# Altium PCB PCB1.2.PcbDoc (part 1 of 2)
Units mil, origin at the board's own origin, x right, y up, seen from the top; angles counter-clockwise.
Board outline 1692.91 x 1692.91 mil, 4 copper layers (Top Layer, Mid-Layer 1, Mid-Layer 2, Bottom Layer); 153 components, 106 nets, 555 pads, 234 vias.
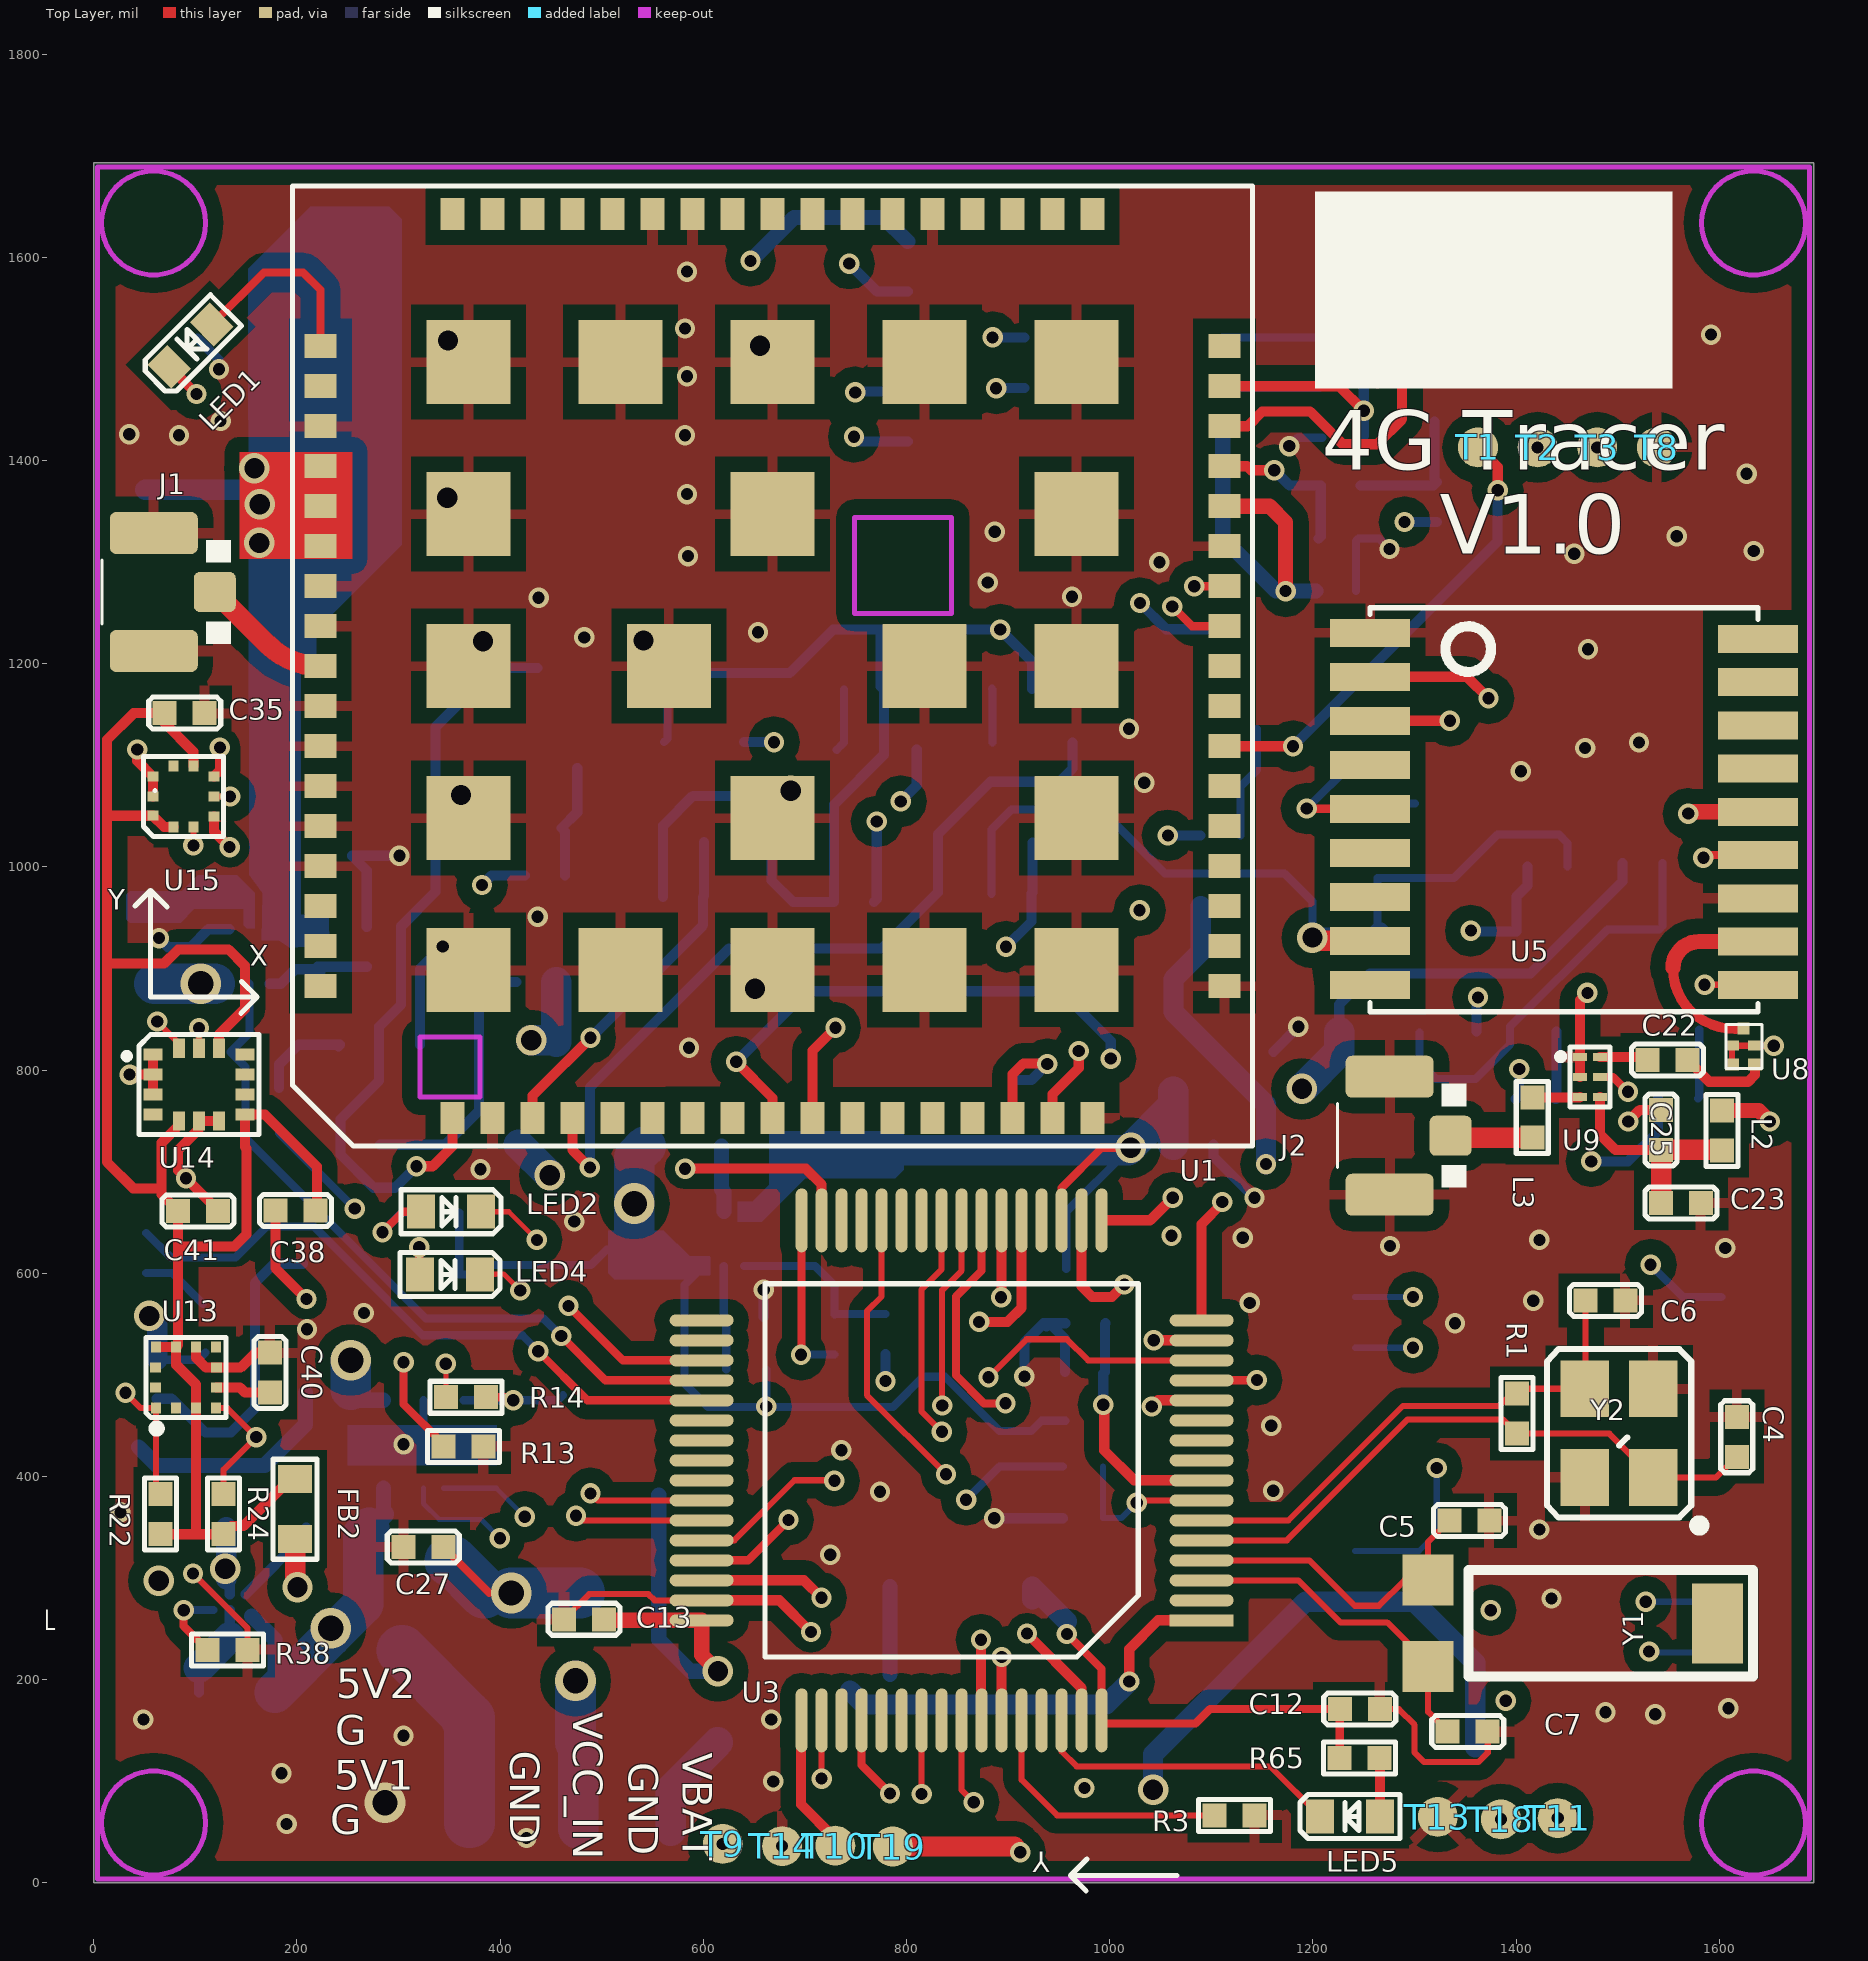
[diagram p0: Top Layer view]
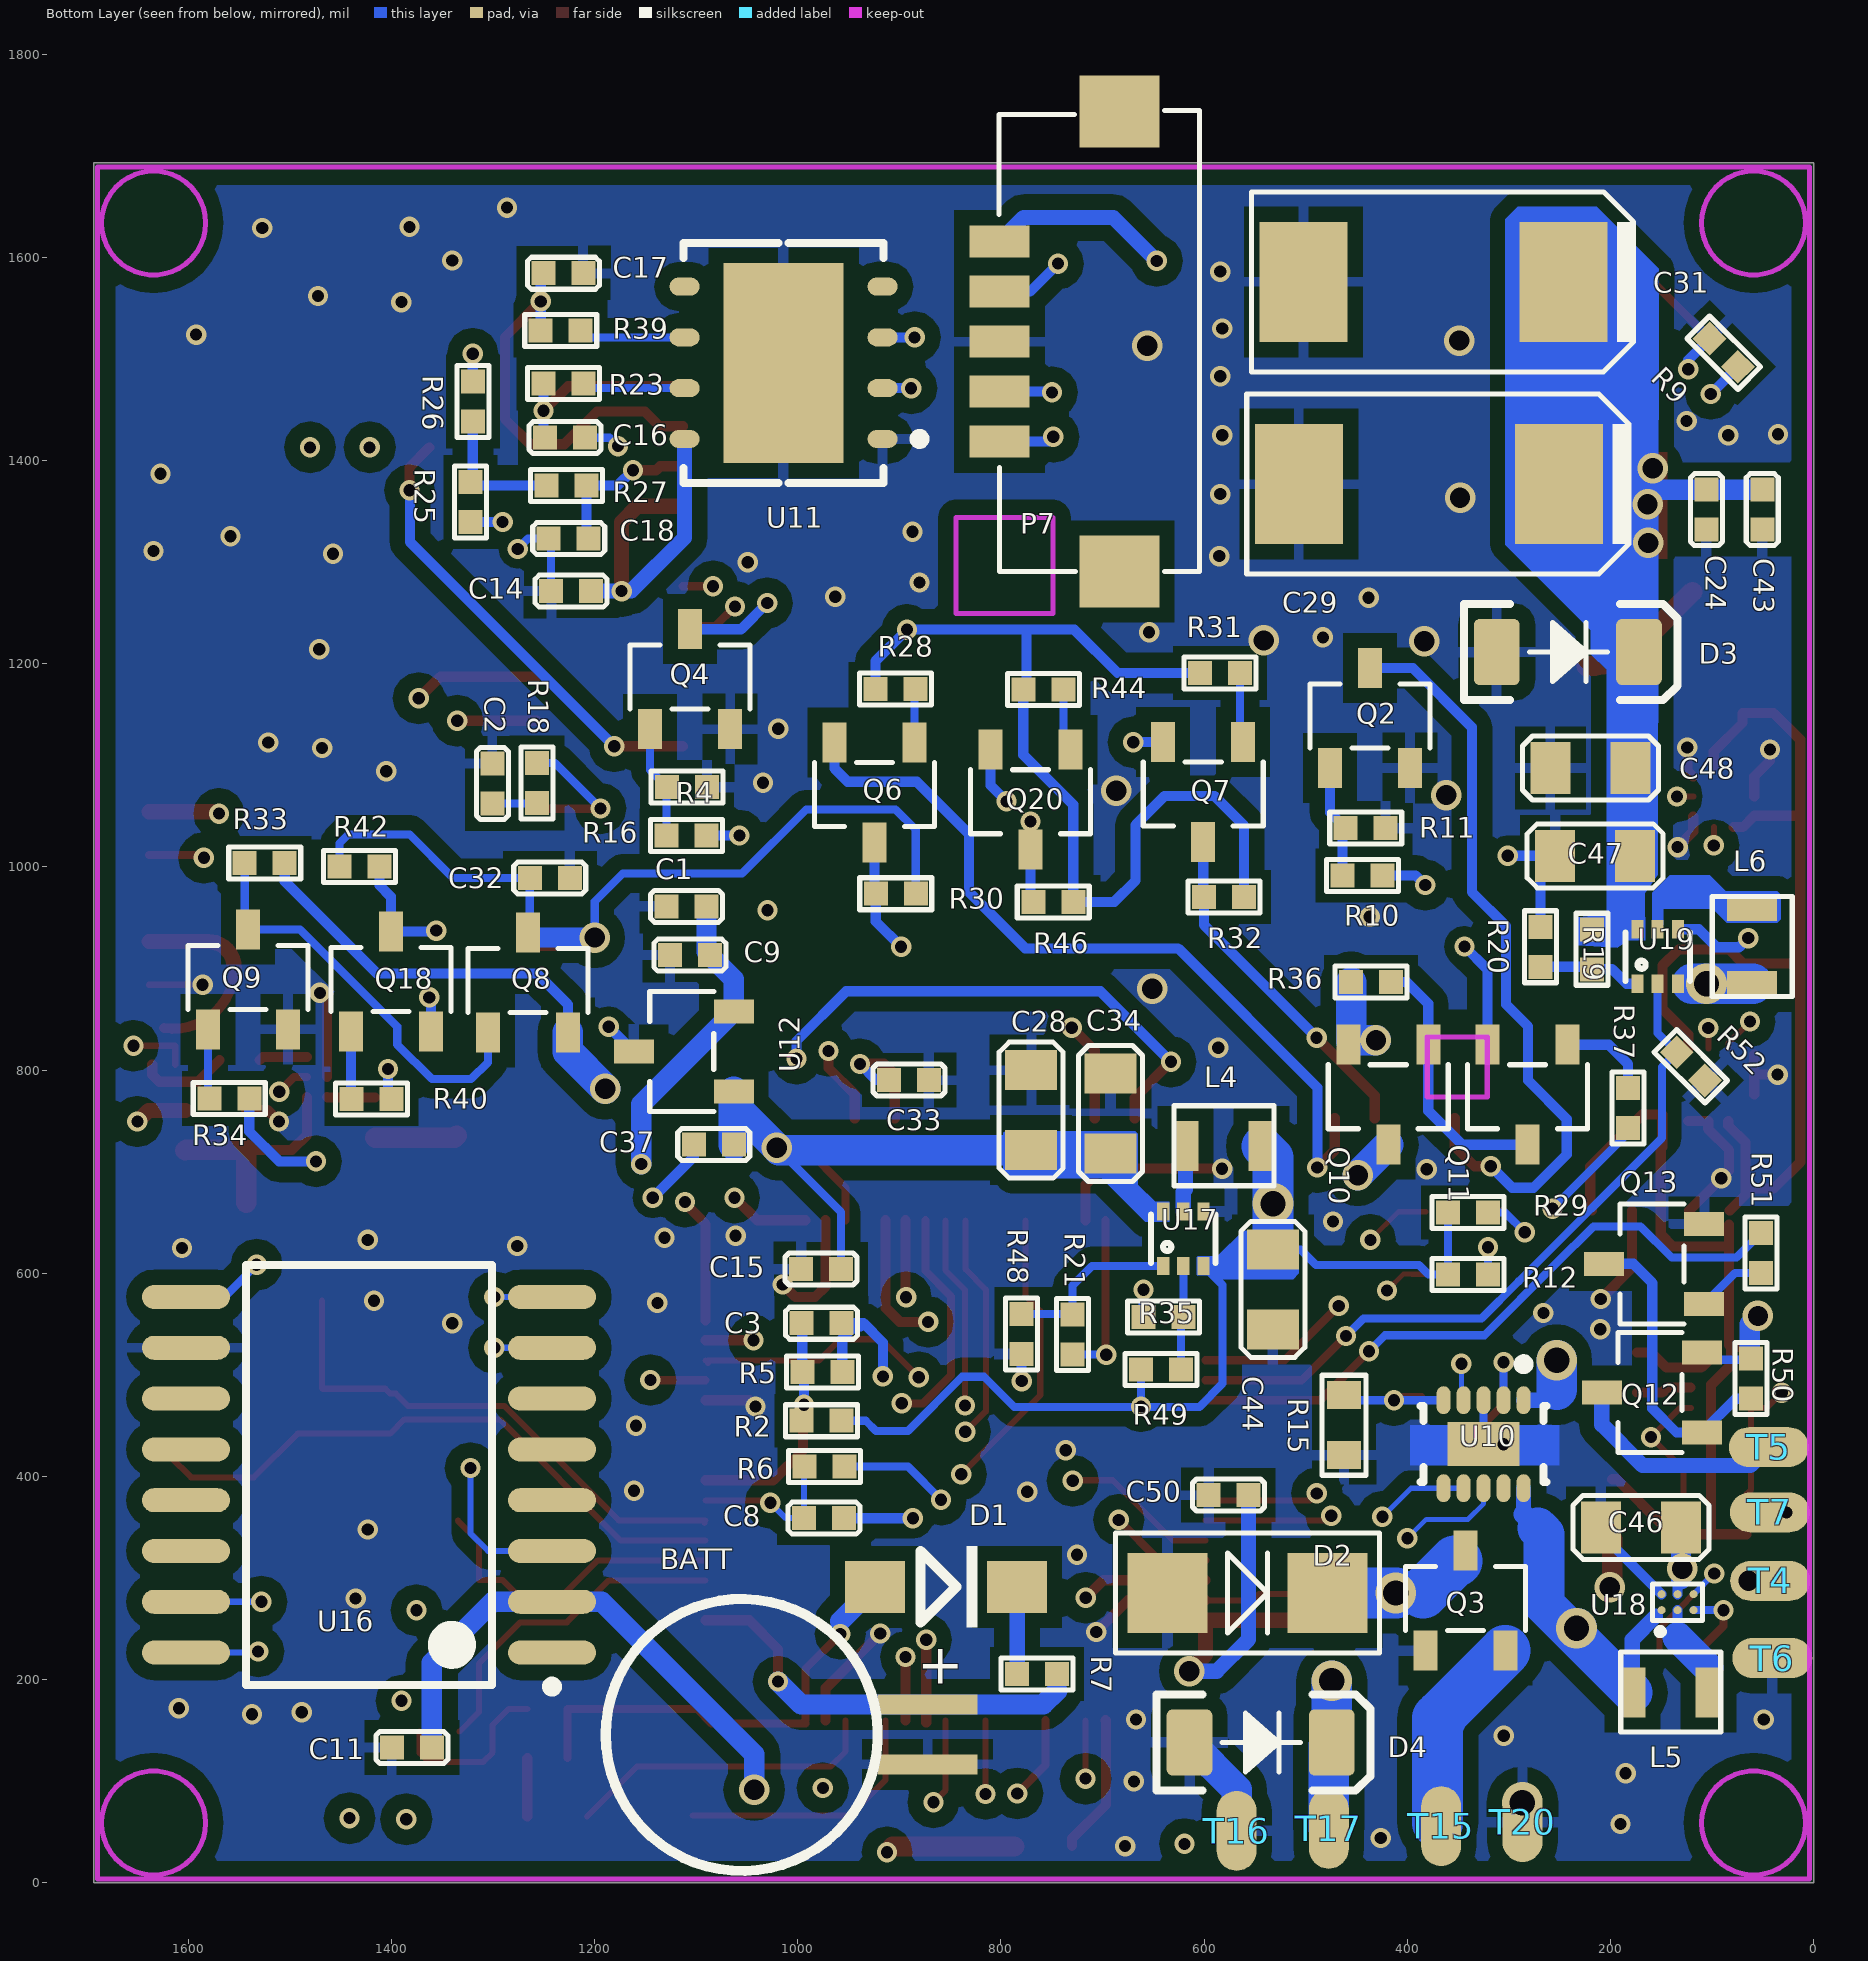
[diagram p1: Bottom Layer view, seen from below]
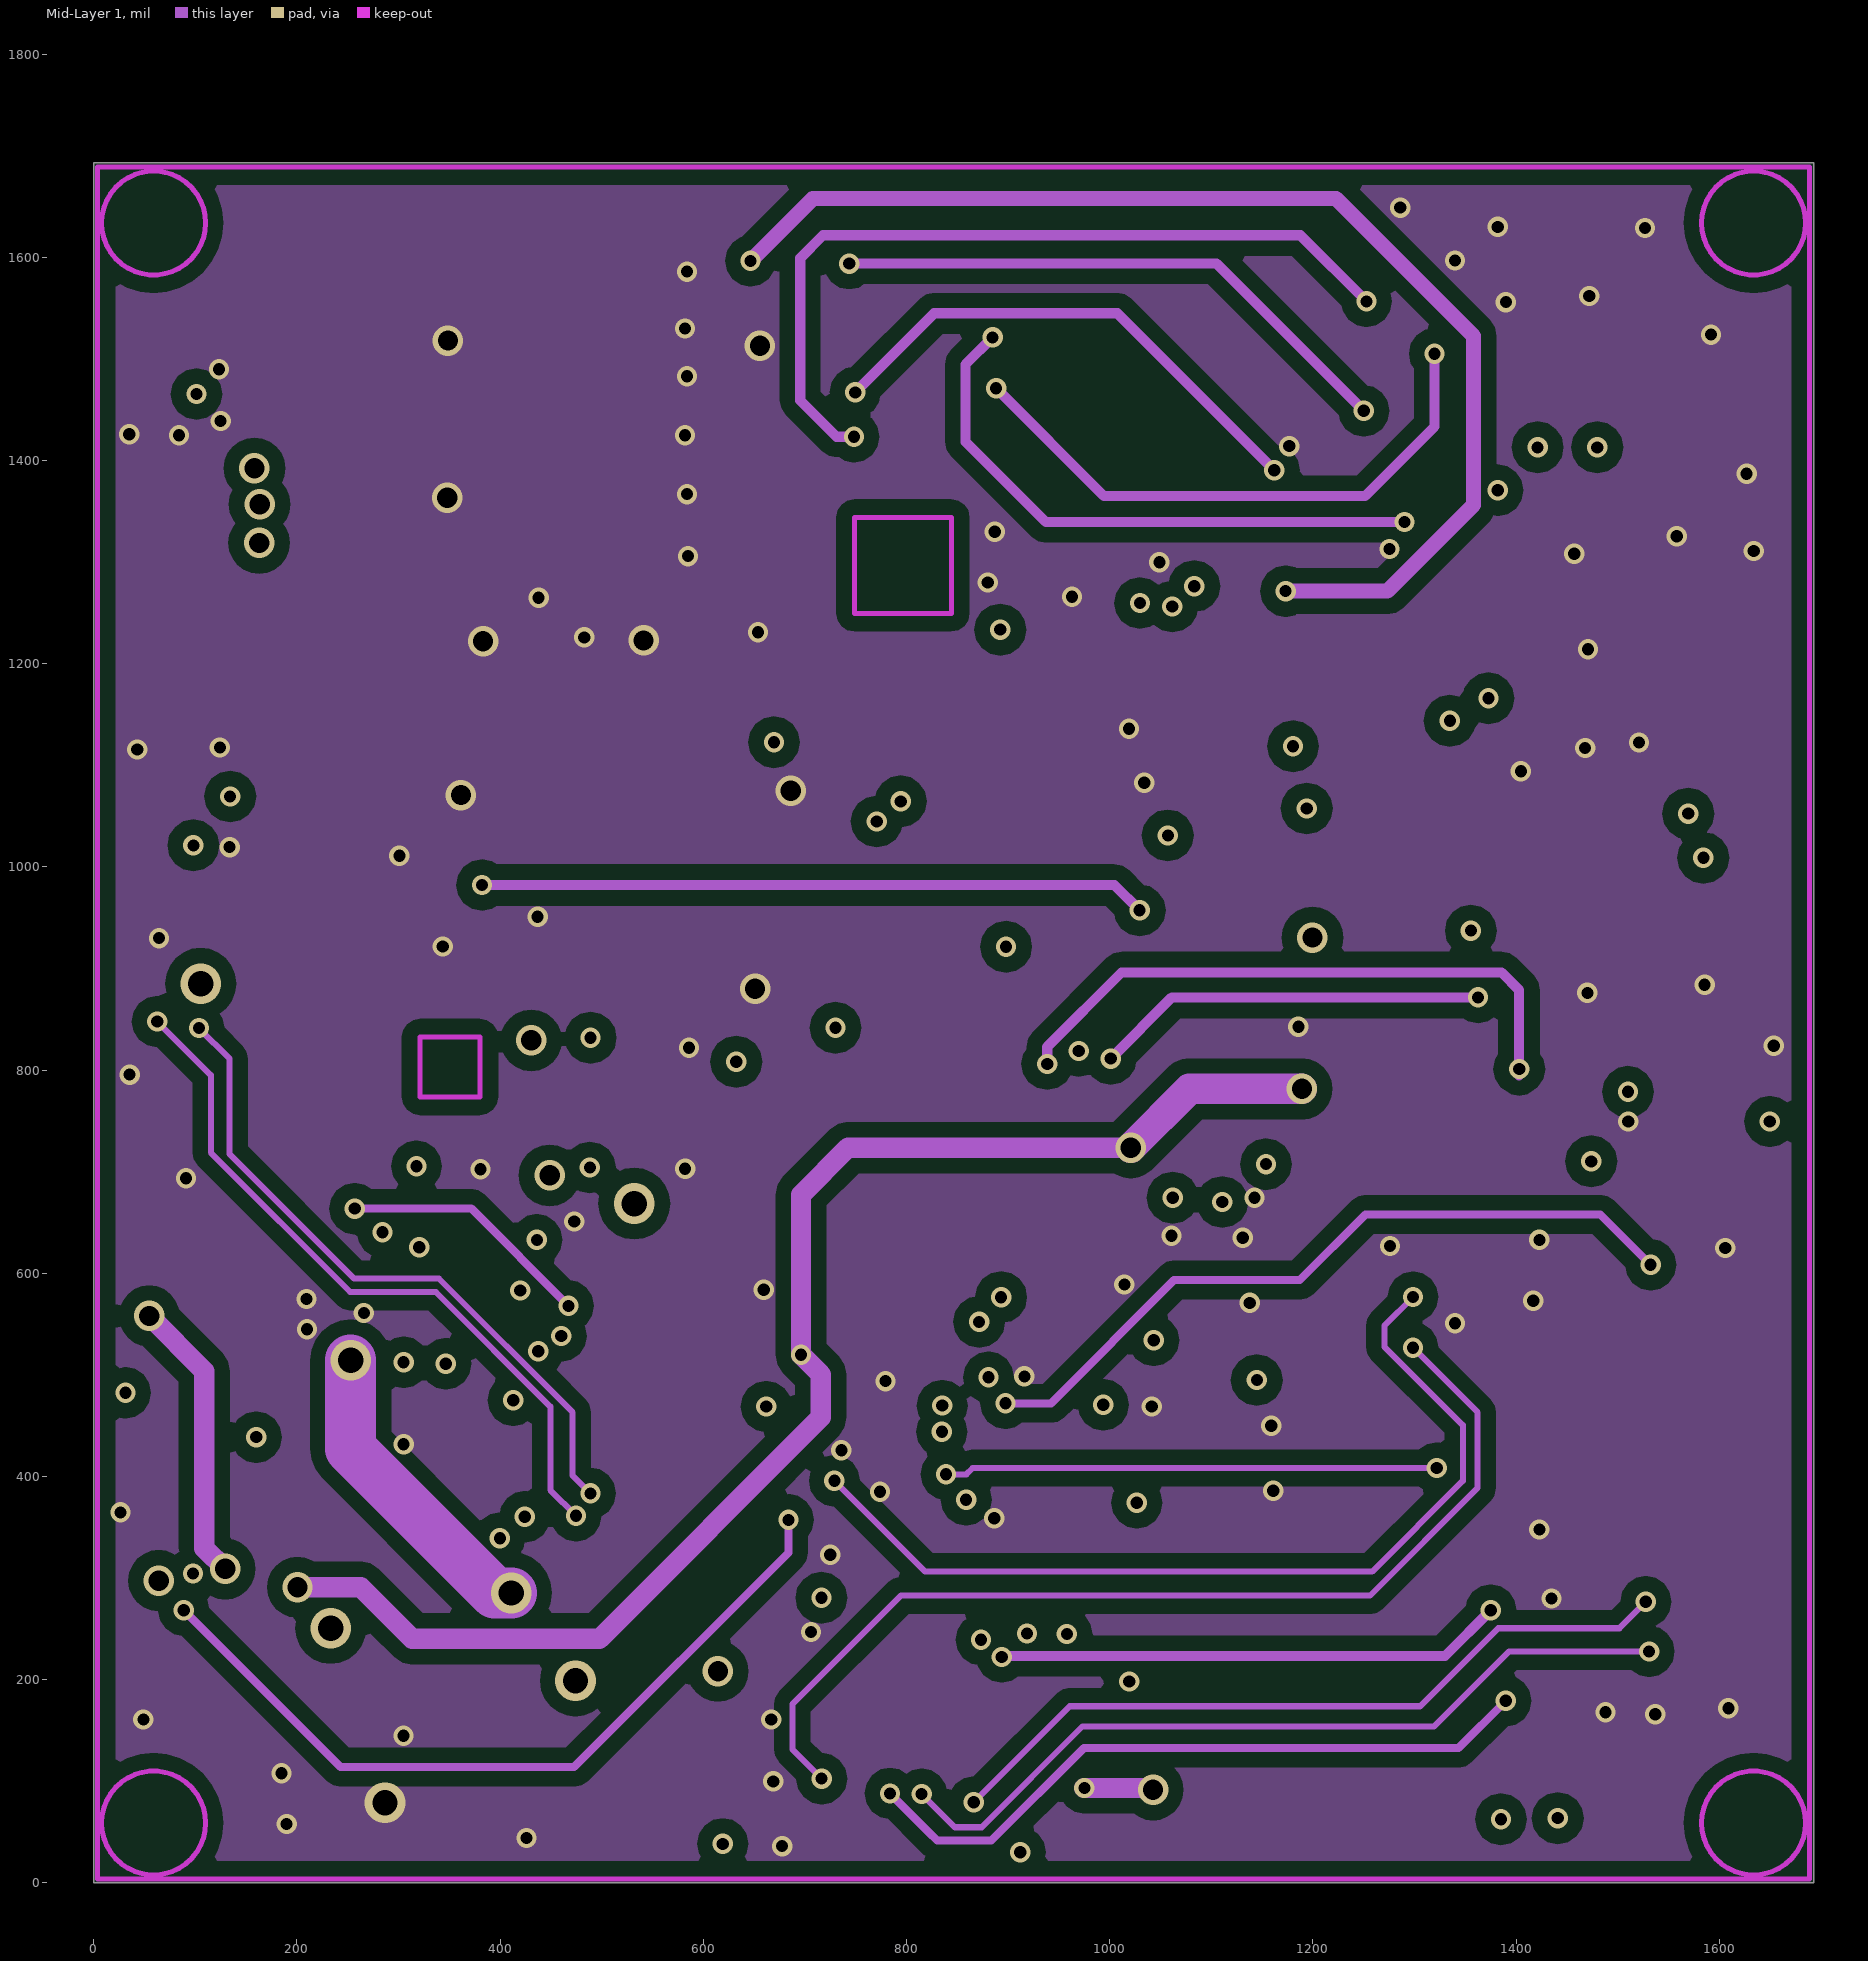
[diagram p2: Mid-Layer 1]
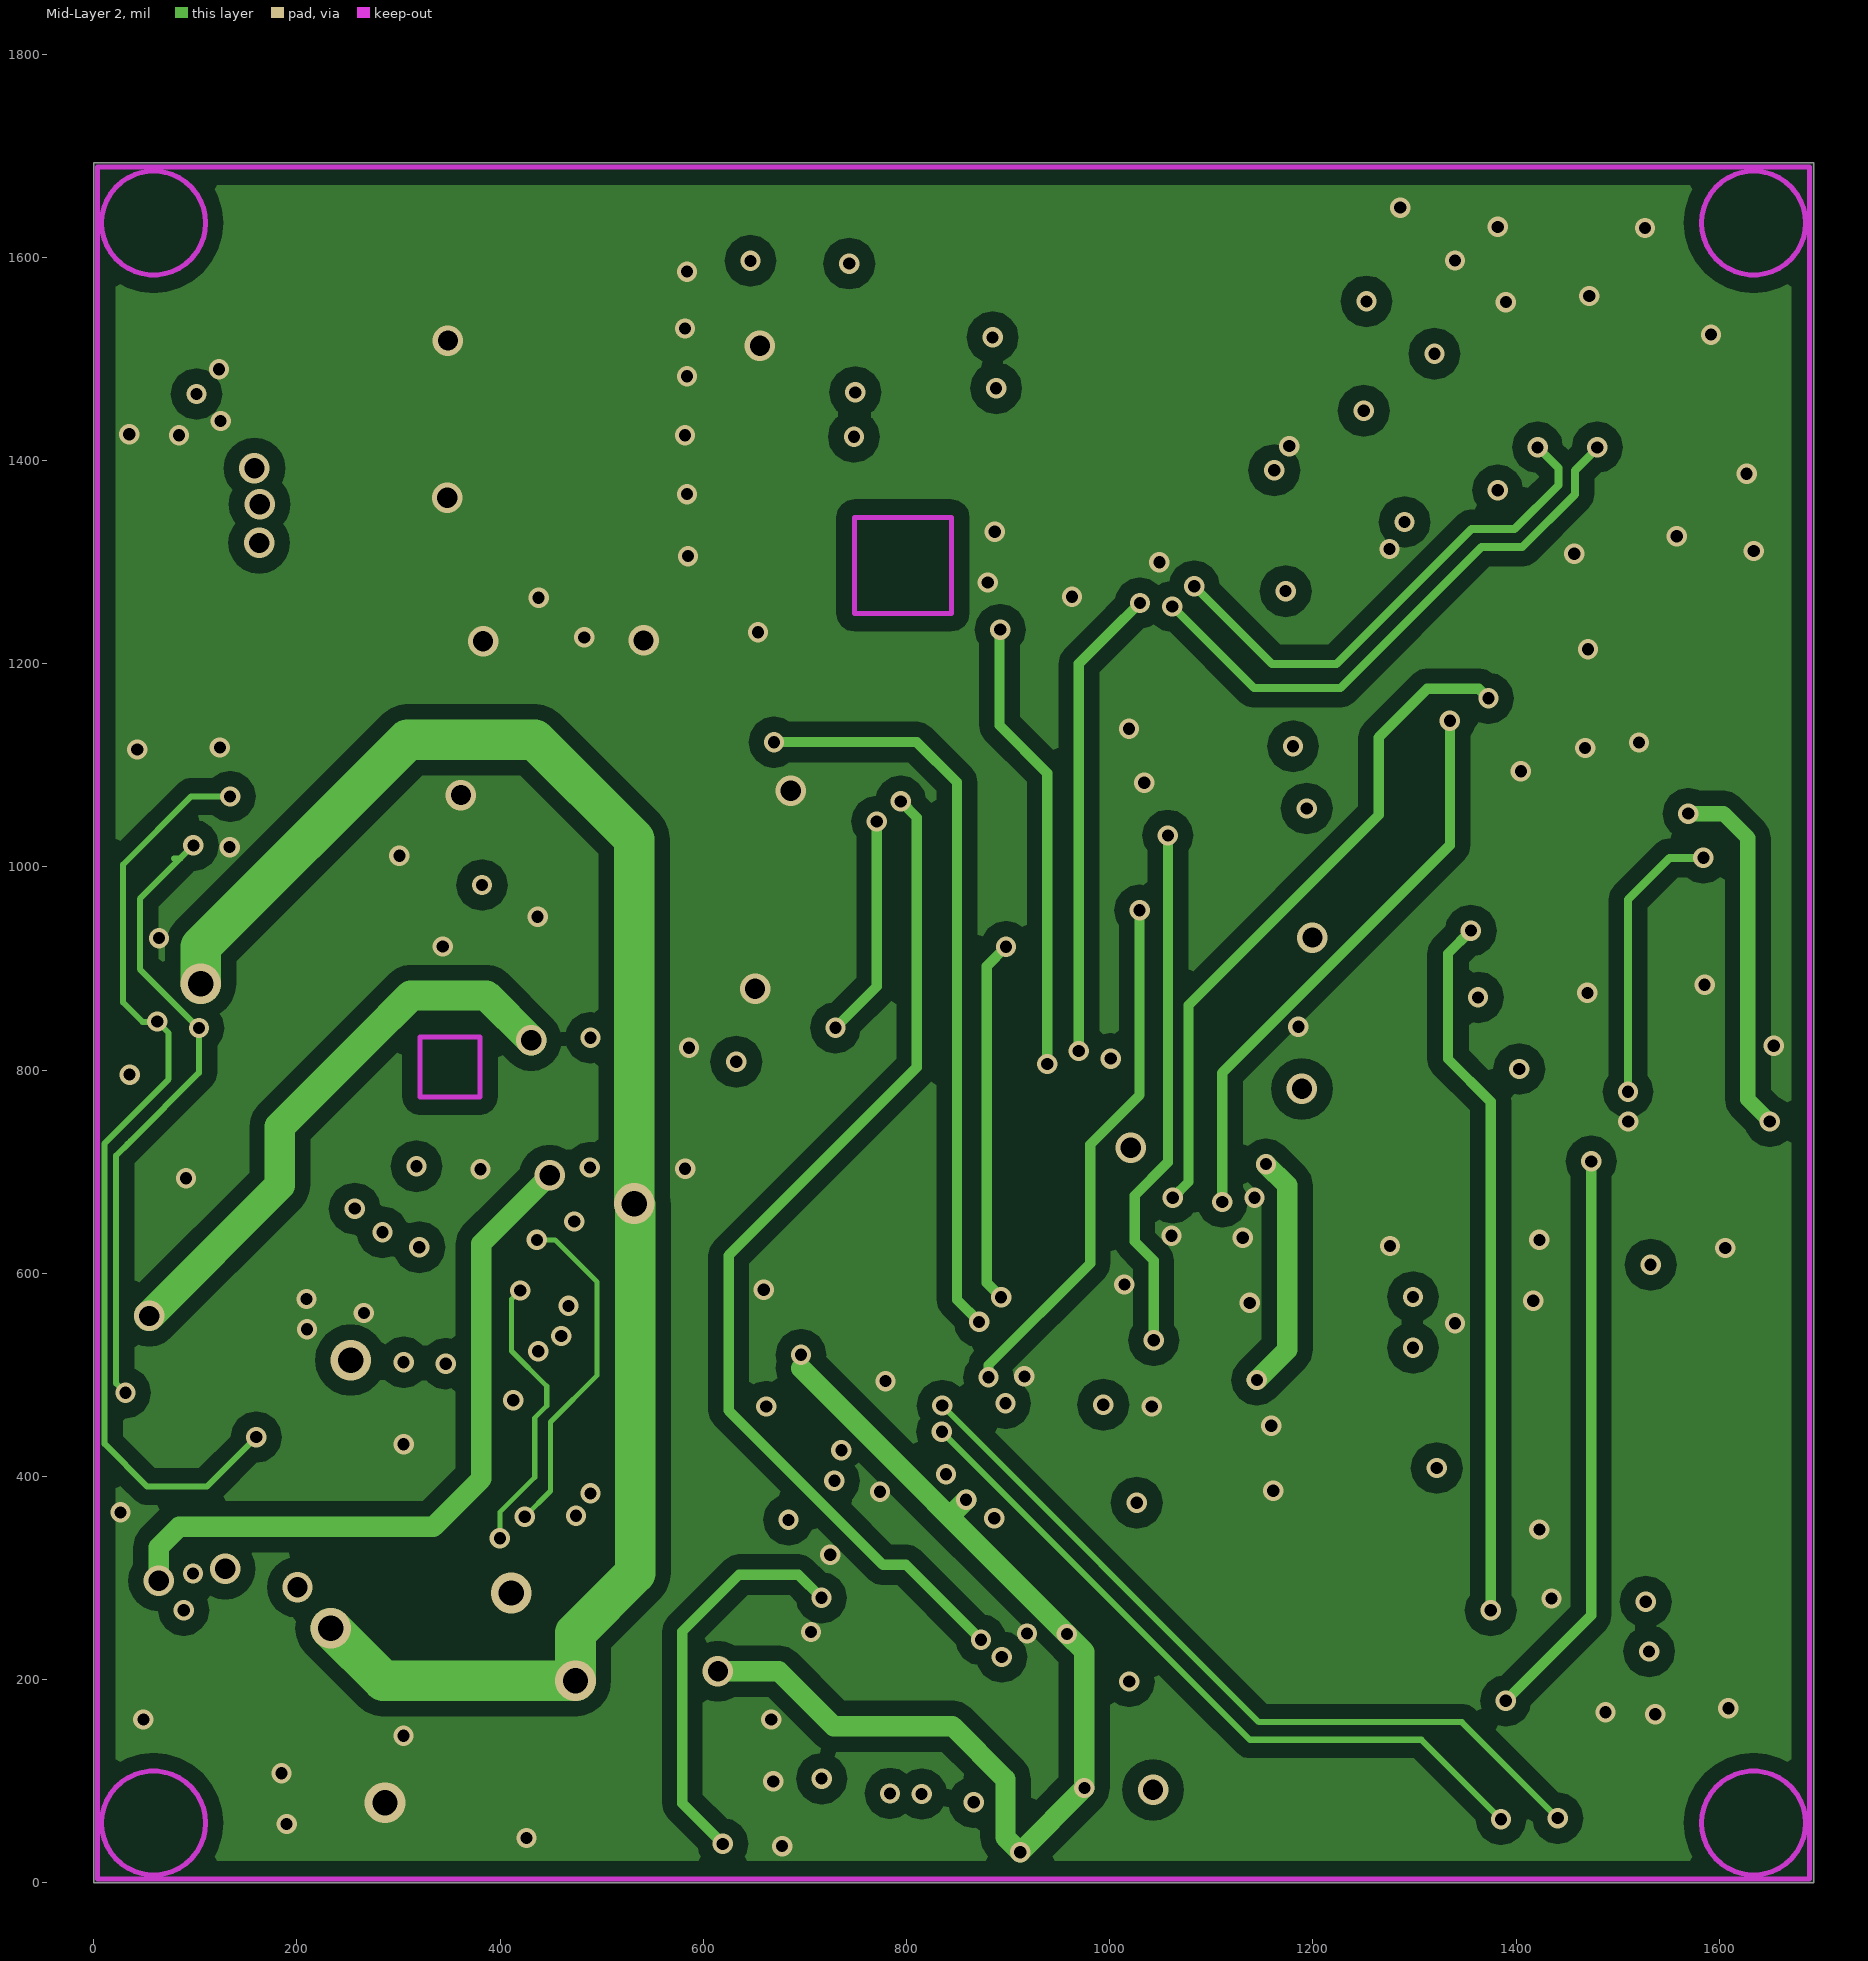
[diagram p3: Mid-Layer 2]

## Layer stack, top to bottom
Top Layer: signal copper 1.4
Dielectric: core 12.6, FR-4, Dk 4.8
Mid-Layer 1: signal copper 1.4
Dielectric: prepreg 12.6, FR-4, Dk 4.8
Mid-Layer 2: signal copper 1.4
Dielectric: core 12.6, FR-4, Dk 4.8
Bottom Layer: signal copper 1.4

## Board outline
0,0 0,1692.91 1692.91,1692.91 1692.91,0

## Design rules (kind name [scope] priority, off if disabled: settings)
Clearance [InPolygon  And InNet(AGND)] p1: gap=15
Clearance Clearance_1 [All] p2: gap=5
HoleToHoleClearance [All] p1: gap=5 allowstackedmicrovias=TRUE
MinimumSolderMaskSliver [All] p1: minsoldermaskwidth=1
PolygonConnect PolygonConnect_1 [InNet('AGND') And IsVia] p1: connectstyle=Direct reliefconductorwidth=10 reliefentries=4 polygonreliefangle="90 Angle"
PolygonConnect [All] p2: connectstyle=Relief reliefconductorwidth=10 reliefentries=4 polygonreliefangle="90 Angle"
RoutingVias [All] p1: holewidth=28 width=50 viastyle="Through Hole" minholewidth=28 minwidth=50 maxholewidth=28 maxwidth=50
SilkToSilkClearance [All] p1: silktosilkclearance=5
SilkscreenOverComponentPads [All] p1: minsilkscreentomaskgap=1
SolderMaskExpansion [All] p1: expansion=4
Width [All] p1: maxlimit=200 minlimit=5 preferedwidth=10
24 further rules are at their usual default settings.

## Classes and differential pairs
component class sensors: C35 C38 C40 C41 FB2 R22 R24 U13 U14 U15
component class power: C1 C27 C28 C34 C37 C44 C46 C47 C48 D2 D4 L4 L5 L6 LED2 LED4 Q3 Q8 Q9 Q10 Q11 Q12 Q13 R12 R13 R14 R15 R19 R20 R21 R29 R33 R34 R35 R36 R37 R38 R48 R49 R50 R51 R52 T4 T5 T6 T7 T15 T16 T17 T20 U10 U12 U17 U18 U19
component class GPS&&lte: C14 C16 C17 C18 C22 C24 C25 C26 C29 C30 C31 C33 C43 D3 J1 J2 L3 LED1 P7 Q2 Q6 Q7 Q18 Q19 Q20 Q21 R8 R9 R10 R11 R23 R25 R26 R27 R28 R30 R31 R32 R39 R40 R41 R42 R43 R44 R45 R46 R47 T1 T2 T3 T8 U8 U9 U11
component class CPU: BATT C3 C4 C5 C6 C7 C8 C9 C11 C12 C13 C15 C50 D1 LED5 R1 R2 R3 R5 R6 R7 R65 T9 T10 T11 T13 T14 T18 T19 U3 U16 U? Y1 Y2
component class 4G: C2 C23 C32 L2 Q4 R4 R16 R18 U1 U5 U?

## Components (designator, comment, footprint, x,y, rotation, side; value= is the part's Value field where it differs from the comment)
BATT "MS621FE" MS621FE 872.01,146.21 r180 bottom
C1 "0.1uF/25V" 0402c 1089.72,961.28 r0 bottom
C2 "4.7uF/10V" 0402c 1300.49,1101.8 r270 bottom
C3 "0.1uF/25v" 0402c 996.01,550.96 r180 bottom
C4 "22pF" 0402c 1617.28,458.89 r270 top
C5 "6pF" 0402c 1334.39,356.65 r0 top
C6 "22pF" 0402c 1507.66,573.47 r180 top
C7 "6pF" 0402c 1332.81,148.94 r0 top
C8 "0.1uF/25V" 0402C 954.15,359.06 r0 bottom
C9 "0.1uF/25V" 0402C 1125.8,913.17 r180 bottom
C11 "0.1uF/25V" 0402C 1399.36,133.32 r180 bottom
C12 "0.1uF/25V" 0402C 1265.91,171.19 r180 top
C13 "0.1uF/25V" 0402C 462.99,259.57 r0 top
C14 "0.1uF" 0402C 1242.61,1271.52 r180 bottom
C15 "0.1uF/25V" 0402C 996.63,604.27 r180 bottom
C16 "10pF/NC" 0402C 1209.23,1422.54 r0 bottom
C17 "10pF/NC" 0402C 1210.93,1584.43 r0 bottom
C18 "10pF/NC" 0402C 1244.98,1323.16 r180 bottom
C22 "36pF" 0402c 1568.88,809.95 r180 top
C23 "4.7uF" 0402c 1581.96,669.2 r180 top
C24 "10pF" 0402C 105.52,1331.99 r90 bottom
C25 "0.1uF" 0402C 1542.8,760.92 r270 top
C27 "1uF/25V" 0402C 344.14,330.73 r180 top
C28 "22uF/10V" 0805C 770.13,721.31 r90 bottom
C29 "1000uF" 7343 250.82,1376.86 r0 bottom
C31 "1000uF" 7343 246.2,1575.91 r0 bottom
C32 "10uF/10V" 0402C 1224.24,989.17 r0 bottom
C33 "0.1uF" 0402C 870.74,790.24 r0 bottom
C34 "22uF/10V" 0805C 692.01,718.02 r90 bottom
C35 "0.1uF/25V" 0402C 109.37,1151.43 r180 top
C37 "0.1uF/25V" 0402c 1062.85,726.85 r0 bottom
C38 "0.1uF/25V" 0402C 178.89,661.86 r0 top
C40 "22pF" 0402c 173.68,482.65 r90 top
C41 "0.1uF/25V" 0402C 122.56,661.31 r180 top
C43 "33pF" 0402C 50.52,1331.99 r90 bottom
C44 "22uF/10V" 0805C 532.3,623.68 r270 bottom
C46 "22uF/10V" 0805C 130.61,350.05 r0 bottom
C47 "22uF/10V" 0805C 175.66,1011 r0 bottom
C48 "22uF/10V" 0805C 180.33,1097.41 r0 bottom
C50 "0.1uF/25V" 0402C 595.63,381.79 r180 bottom
D1 "1N4148" DIODE_SOP 923.93,291.5 r180 bottom
D2 "SMAJ12CA" SMA 635.95,285.46 r180 bottom
D3 "DIODE_SCHOTTKY_0" LL-34(D1206) 241.83,1211.58 r180 bottom
D4 "DIODE_SCHOTTKY_0" LL-34(D1206) 544.3,138.31 r180 bottom
FB2 "10R/1A" 0603R 198.31,338.35 r90 top
J1 "IPEX" RF-UFL 59.23,1270.68 r90 top
J2 "IPEX" RF-UFL 1275.57,735.51 r90 top
L2 "27nH" 0402R 1602.59,760.37 r270 top
L3 "LQW15A" 0402R 1415.99,772.98 r270 top
L4 "SRP4020TA-1R0M" L2520 618.1,725.29 r180 bottom
L5 "SRP4020TA-2R2M" L2520 178.44,187.47 r180 bottom
L6 "SRP4020TA-1R0M" L2520 60.79,959.55 r270 bottom
LED1 "LED" 0603LED 116.28,1534.01 r225 top
LED2 "LED" 0603LED 322.31,660.67 r0 top
LED4 "LED" 0603LED 321.42,598.88 r0 top
LED5 "LED" 0603LED 1266.17,65.51 r180 top
P7 "Header 5" 5×1.25mmSMT 801.29,1418.68 r90 bottom
Q2 "MMBT3904" SOT23-3 475.97,1097.49 r270 bottom
Q3 "Si2369DS" sot23-3 382.17,228.73 r270 bottom
Q4 "MMBT3904" SOT23-3 1145.18,1135.64 r270 bottom
Q6 "MMBT3904" SOT23-3 884.79,1122.61 r90 bottom
Q7 "MMBT3904" SOT23-3 561.39,1122.86 r90 bottom
Q8 "Si2369DS" sot23-3 1304.83,837.26 r270 bottom
Q9 "S8050" SOT23-3 1580.35,840.22 r270 bottom
Q10 "Si2369DS" sot23-3 379.26,825.07 r90 bottom
Q11 "S8050" SOT23-3 242.37,825.07 r90 bottom
Q12 "Si2369DS" sot23-3 110.01,443.42 r180 bottom
Q13 "S8050" SOT23-3 107.7,570.06 r180 bottom
Q18 "MMBT3904" SOT23-3 1439.74,838.2 r270 bottom
Q20 "MMBT3904" SOT23-3 731.43,1115.4 r90 bottom
R1 "1MR" 0402R 1400.98,442.31 r90 top
R2 "10K/1%" 0402R 956.64,454.96 r0 bottom
R3 "100K" 0402R 1103.44,66.57 r0 top
R4 "47K" 0402R 1128.41,1078.75 r180 bottom
R5 "10K/1%" 0402R 995.38,502.96 r180 bottom
R6 "10K" 0402R 953.84,409.98 r0 bottom
R7 "470" 0402R 783.93,205.5 r180 bottom
R9 "1K" 0402R 74.52,1492.25 r45 bottom
R10 "4.7K" 0402R 463.84,991.78 r180 bottom
R11 "47K" 0402R 460.5,1038.36 r180 bottom
R12 "1K/1%" 0402R 359.82,598.88 r180 bottom
R13 "3.95K/1%" 0402R 344.42,429.61 r0 top
R14 "21.5k/1%" 0402R 386.04,478.12 r180 top
R15 "RTH103AT" 0603R 462.09,421.01 r90 bottom
R16 "4.7K" 0402R 1128.89,1031.08 r180 bottom
R18 "10K" 0402R 1256.45,1102.51 r270 bottom
R19 "534K/1%" 0402R 218.11,938.7 r270 bottom
R20 "100K/1%" 0402R 268.86,941.18 r270 bottom
R21 "400K/1%" 0402R 729.29,520.29 r90 bottom
R22 "4.7K" 0402R 65.98,343.31 r90 top
R23 "10R" 0402R 1250.1,1475.71 r180 bottom
R24 "4.7K" 0402R 127.98,382.68 r270 top
R25 "0R" 0402R 1322.06,1339.5 r90 bottom
R26 "0R" 0402R 1319.7,1477.89 r270 bottom
R27 "10R" 0402R 1207.87,1375.58 r0 bottom
R28 "4.7K" 0402R 884.13,1175.39 r0 bottom
R29 "1K/1%" 0402R 359.82,659.88 r180 bottom
R30 "10K" 0402R 923.08,973.7 r180 bottom
R31 "4.7K" 0402R 564.73,1190.95 r0 bottom
R32 "4.7K" 0402R 599.92,970.47 r180 bottom
R33 "4K7" 0402R 1504.82,1003.9 r0 bottom
R34 "4K7" 0402R 1579.09,772.22 r180 bottom
R35 "10K/1%" 0402R 659.61,557 r180 bottom
R36 "4K7" 0402R 455.29,886.64 r180 bottom
R37 "4K7" 0402R 182.56,782.38 r270 bottom
R38 "10K/1%" 0402R 151.6,229.5 r180 top
R39 "10R" 0402R 1252.83,1528.22 r180 bottom
R40 "4.7K" 0402R 1439.1,771.53 r180 bottom
R42 "10K" 0402R 1411.45,1000.45 r0 bottom
R44 "4.7K" 0402R 738.48,1174.67 r0 bottom
R46 "4.7K" 0402R 768.04,965.65 r180 bottom
R48 "100K/1%" 0402R 779.48,520.7 r90 bottom
R49 "13K/1%" 0402R 662.09,505.47 r180 bottom
R50 "4K7" 0402R 61.74,516.03 r270 bottom
R51 "4K7" 0402R 51.85,600.34 r90 bottom
R52 "10K/1%" 0402R 106.92,789.93 r45 bottom
R65 "1K" 0402R 1265.84,122.92 r180 top
T1 "TPD" TPD 1362.58,1413.02 r90 top
T2 "TPD" TPD 1421.25,1413.02 r90 top
T3 "TPD" TPD 1479.92,1413.02 r90 top
T4 "TPD" TP#1 42.72,297.4 r180 top
T5 "TPD" TP#1 44.06,429.02 r180 top
T6 "TPD" TP#1 40.58,221.43 r0 top
T7 "TPD" TP#1 43.17,364.83 r180 top
T8 "TPD" TPD 1538.58,1413.02 r90 top
T9 "TPD" TPd 619.24,38.47 r90 top
T10 "TPD" TPd 730.08,36.69 r270 top
T11 "TPD" TPd 1441.02,63.86 r135 top
T13 "TPD" TPd 1323.03,65.12 r135 top
T14 "TPD" TPd 677.68,36.26 r270 top
T15 "TPD" TP#1 366.63,55.96 r270 top
T16 "TPD" TP#1 567.9,51.33 r270 top
T17 "TPD" TP#2 477.15,53.34 r270 bottom
T18 "TPD" TPd 1385.16,62.72 r135 top
T19 "TPD" TPd 786.61,35.87 r135 top
T20 "TPD" TP#1 286.51,60.08 r270 top
U1 "A7670" A7670 668.24,1197.63 r90 top
U3 "stm32l412r8t6" LQFP-64 1090.58,258.54 r180 top
U5 "SIM868E/SIM68" SIM68MB 1256.45,1230.51 r0 top
U8 "SAFFB1G56KB0F0A" SAFFB1G56KB0F0A 1623.9,840.83 r270 top
U9 "AW5005DNR" AW5005 1472.95,793.25 r0 top
U10 "bq24210" QFN50P200X300X80-10N 324.79,431.87 r270 bottom
U11 "SLI76CF3600P" QFN127P500X600X80-8N 1013.83,1496.29 r0 bottom
U12 "REF3025AIDBZR" SOT23-3 1062.85,778.85 r180 bottom
U13 "LIS2MDL" LIS2MDL 91.03,497.37 r90 top
U14 "LSM6DS3TR" LSM6DS3TR-C 103.64,785.78 r0 top
U15 "BMP388" BMP388 88.37,1069.43 r180 top
U16 "MX25L51245GMI-10G" SOP127P1030X239-16N 1421.89,401.77 r0 bottom
U17 "TPS61023" SOT563-6 620.49,633.92 r180 bottom
U18 "TPS610997YFFR" TPS610997YFFR 133.93,276.39 r90 bottom
U19 "TPS61023" SOT563-6 153.58,911.69 r180 bottom
Y1 "MC-146 32.768K/6pF" 32.768K 1313.4,213.11 r90 top
Y2 "8MHz" OSCILLATOR-3.2X2.5 1501.66,442.47 r90 top

## Footprints (in the part's own frame and the unit in brackets; to place one, negate y for a bottom-side part, rotate by r counter-clockwise, add the part's x,y. Pads: shape width x height; smd on the part's side, far side on the other; paste and mask are expansions set on the pad)
5×1.25mmSMT [mm]
  rect 1.8x2 smd: 0(-3.25,-3) 0(8.25,-3)
  rect 0.8x1.5 smd: 1(0,0) 2(1.25,0) 3(2.5,0) 4(3.75,0) 5(5,0)
  round 0.5 on Bottom Overlay: ""(-0.875,0.432)
  silkscreen extent -3.25,-5 8.28,0.02
32.768K [mil]
  rect 50x50 smd: 1(0,0) 2(85,0)
  rect 78.74x50 smd: 3(42.13,-285)
  silkscreen extent -10,-320 95,-40
0402c [mm]
  rect 0.6x0.6 smd: 1(0,0) 2(1,0)
  silkscreen extent -0.4,-0.4 1.4,0.4
0402C [mm]
  rect 0.6x0.6 smd: 1(0,0) 2(1,0)
  silkscreen extent -0.4,-0.4 1.4,0.4
0402R [mm]
  rect 0.6x0.6 smd: 1(0,0) 2(1,0)
  silkscreen extent -0.4,-0.4 1.4,0.4
0603LED [mm]
  rect 0.7x0.85 smd: 1(0,0) 2(1.5,0)
  silkscreen extent -0.5,-0.55 2,0.55
0603R [mm]
  rect 0.7x0.85 smd: 1(0,0) 2(1.5,0)
  silkscreen extent -0.5,-0.55 2,0.55
0805C [mm]
  rect 1x1.3 smd: 1(0,0) 2(2,0)
  silkscreen extent -0.7,-0.8 2.7,0.8
7343 [mm]
  rect 2.2x3 smd: 1(0,0) 2(6.5,0)
  silkscreen extent -1.75,-2.25 7.8,2.25
A7670 [mm]
  rect 0.8x0.6 smd: 1(-11.3,8) 2(-11.3,7) 3(-11.3,6) 4(-11.3,5) 5(-11.3,4) 6(-11.3,3) 7(-11.3,2) 8(-11.3,1) 9(-11.3,0) 10(-11.3,-1) 11(-11.3,-2) 12(-11.3,-3) 13(-11.3,-4) 14(-11.3,-5) 15(-11.3,-6) 16(-11.3,-7) 17(-11.3,-8) 35(11.3,-8) 36(11.3,-7) 37(11.3,-6) 38(11.3,-5) 39(11.3,-4) 40(11.3,-3) 41(11.3,-2) 42(11.3,-1) 43(11.3,0) 44(11.3,1) 45(11.3,2) 46(11.3,3) 47(11.3,4) 48(11.3,5) 49(11.303,6) 50(11.3,7) 51(11.3,8)
  rect 0.6x0.8 smd: 18(-8,-11.3) 19(-7,-11.3) 20(-6,-11.3) 21(-5,-11.3) 22(-4,-11.3) 23(-3,-11.3) 24(-2,-11.3) 25(-1,-11.3) 26(0,-11.3) 27(1,-11.3) 28(2,-11.3) 29(3,-11.3) 30(4,-11.3) 31(5,-11.3) 32(6,-11.3) 33(7,-11.3) 34(8,-11.3) 52(8,11.3) 53(7,11.3) 54(6,11.3) 55(5,11.3) 56(4,11.3) 57(3,11.3) 58(2,11.3) 59(1,11.3) 60(0,11.3) 61(-1,11.3) 62(-2,11.3) 63(-3,11.3) 64(-4,11.3) 65(-5,11.3) 66(-6,11.3) 67(-7,11.3) 68(-8,11.3)
  rect 2.1x2.1 smd: 69(-7.6,7.6) 70(-7.6,3.8) 71(-7.6,0) 72(-7.6,-3.8) 73(-7.6,-7.6) 74(-3.8,-7.6) 75(0,-7.6) 76(3.8,-7.6) 77(7.6,-7.6) 78(7.6,-3.8) 79(7.6,0) 80(7.6,3.8) 81(7.6,7.6) 82(3.8,7.6) 83(0,7.6) 84(-3.8,7.6) 85(-3.8,0) 86(0,-3.8) 87(3.8,0) 88(0,2.591)
  Keep-Out Layer lines w0.127: 1.321,-2.045 3.721,-2.045 ; 1.321,-2.07 1.321,-4.47 3.721,-4.47 3.721,-2.07 ; -10.77,8.814 -10.77,7.314 -9.27,7.314 -9.27,8.814 -10.77,8.814
  silkscreen extent -12,-12 12,12
AW5005 [mm]
  rect 0.35x0.2 smd: 1(-0.25,0.5) 2(-0.25,0) 3(-0.25,-0.5) 4(0.25,-0.5) 5(0.25,0) 6(0.25,0.5)
  silkscreen extent -0.77,-0.75 0.5,0.75
BMP388 [mm]
  rect 0.25x0.275 smd: 1(0.25,0.763) 2(-0.25,0.763) 6(-0.25,-0.763) 7(0.25,-0.763)
  rect 0.275x0.25 smd: 3(-0.762,0.5) 4(-0.762,0) 5(-0.762,-0.5) 8(0.763,-0.5) 9(0.763,0) 10(0.763,0.483)
  silkscreen extent -1,-1 1,1
DIODE_SOP [mm]
  rect 1.5x1.3 smd: 1(0,0) 2(3.556,0)
  silkscreen extent 1.14,-1.02 2.56,1.02
L2520 [mm]
  rect 0.65x1.25 smd: 1(0,0) 2(1.9,0)
  silkscreen extent -0.29,-0.99 2.21,1.01
LIS2MDL [mm]
  rect 0.275x0.25 smd: 1(-0.763,0.75) 2(-0.763,0.25) 3(-0.763,-0.25) 4(-0.763,-0.75) 7(0.763,-0.75) 8(0.763,-0.25) 9(0.763,0.25) 10(0.763,0.75)
  rect 0.25x0.275 smd: 5(-0.25,-0.763) 6(0.25,-0.763) 11(0.25,0.762) 12(-0.25,0.762)
  silkscreen extent -1.35,-1 1,1
LL-34(D1206) [mil]
  rrect25% 45x65 smd: 1(-70,0) 2(70,0)
  silkscreen extent -102,-47 108,47, body extent -70,-28 68,30, height 56
LQFP-64 [mm]
  rect 1.6x0.3 smd: 1(0,0)
  oval 1.6x0.3 smd: 2(0,-0.5) 3(0,-1) 4(0,-1.5) 5(0,-2) 6(0,-2.5) 7(0,-3) 8(0,-3.5) 9(0,-4) 10(0,-4.5) 11(0,-5) 12(0,-5.5) 13(0,-6) 14(0,-6.5) 15(0,-7) 16(0,-7.5) 33(12.5,-7.5) 34(12.5,-7) 35(12.5,-6.5) 36(12.5,-6) 37(12.5,-5.5) 38(12.5,-5) 39(12.5,-4.5) 40(12.5,-4) 41(12.5,-3.5) 42(12.5,-3) 43(12.5,-2.5) 44(12.5,-2) 45(12.5,-1.5) 46(12.5,-1) 47(12.5,-0.5) 48(12.5,0)
  oval 0.3x1.6 smd: 17(2.5,-10) 18(3,-10) 19(3.5,-10) 20(4,-10) 21(4.5,-10) 22(5,-10) 23(5.5,-10) 24(6,-10) 25(6.5,-10) 26(7,-10) 27(7.5,-10) 28(8,-10) 29(8.5,-10) 30(9,-10) 31(9.5,-10) 32(10,-10) 49(10,2.5) 50(9.5,2.5) 51(9,2.5) 52(8.5,2.5) 53(8,2.5) 54(7.5,2.5) 55(7,2.5) 56(6.5,2.5) 57(6,2.5) 58(5.5,2.5) 59(5,2.5) 60(4.5,2.5) 61(4,2.5) 62(3.5,2.5) 63(3,2.5) 64(2.5,2.5)
  silkscreen extent 1.59,-8.41 10.91,0.91
LSM6DS3TR-C [mm]
  rect 0.48x0.3 smd: 1(-1.15,0.75) 2(-1.15,0.25) 3(-1.15,-0.25) 4(-1.15,-0.75) 8(1.15,-0.75) 9(1.15,-0.25) 10(1.15,0.25) 11(1.15,0.75)
  rect 0.3x0.48 smd: 5(-0.5,-0.91) 6(0,-0.91) 7(0.5,-0.91) 12(0.5,0.91) 13(0,0.91) 14(-0.5,0.91)
  silkscreen extent -1.83,-1.25 1.5,1.25
MS621FE [mm]
  rect 2.5x0.5 smd: 1(0,-0.749) 2(0,0.749)
  silkscreen extent -8.05,-3.41 -1.25,3.39
OSCILLATOR-3.2X2.5 [mil] "OSCILLATOR-3.2X2.5"
  rect 56x48 smd: 1(-43.31,-33.46) 2(44,-33.46) 3(44,34) 4(-43.31,34)
  silkscreen extent -95,-83 83,71
QFN50P200X300X80-10N [mm] "QFN, 10-Leads, Body 2.9x1.9mm (max), Pitch 0.50mm, IPC Medium Density"
  oval 0.7x0.35 smd: 1(-1.1,1) 2(-1.1,0.5) 3(-1.1,0) 4(-1.1,-0.5) 5(-1.1,-1) 6(1.1,-1) 7(1.1,-0.5) 8(1.1,0) 9(1.1,0.5) 10(1.1,1)
  rect 1.1x1.8 smd: 11(0,0)
  silkscreen extent -2.12,-1.58 0.95,1.58, body extent -0.95,-1.45 0.95,1.45, height 0.8
QFN127P500X600X80-8N [mm] "QFN, 8-Leads, Body 6.0x5.0mm (max), Pitch 1.27mm, IPC Medium Density"
  oval 0.75x0.45 smd: 1(-2.475,1.905) 2(-2.475,0.635) 3(-2.475,-0.635) 4(-2.475,-1.905) 5(2.475,-1.905) 6(2.475,-0.635) 7(2.475,0.635) 8(2.475,1.905)
  rect 3x5 smd: 9(0,0)
  silkscreen extent -3.52,-3 2.5,3
RF-UFL [mm]
  rrect30% 1x1.05 smd: 1(0,-1.525)
  rrect30% 1.05x2.2 smd: 2(-1.475,0) 2(1.475,0)
  silkscreen extent -1.3,-1.93 1.3,1.3, body extent -1.7,-1.55 1.7,1.55, height 1.25
SAFFB1G56KB0F0A [mm]
  rect 0.3x0.3 smd: 1(0,0)
  rect 0.25x0.35 smd: 2(0.425,-0.287) 5(0.425,0.288)
  rect 0.3x0.35 smd: 3(0.9,-0.287) 4(0.9,0.288)
  silkscreen extent -0.1,-0.44 1,0.46
SIM68MB [mm]
  rect 2x0.7 smd: 1(0,0) 2(0,-1.1) 3(0,-2.2) 4(0,-3.3) 5(0,-4.4) 6(0,-5.5) 7(0,-6.6) 8(0,-7.7) 9(0,-8.8) 10(9.7,-8.8) 11(9.7,-7.719) 12(9.7,-6.638) 13(9.7,-5.557) 14(9.7,-4.476) 15(9.7,-3.395) 16(9.7,-2.314) 17(9.7,-1.233) 18(9.7,-0.152)
  silkscreen extent 0,-9.47 9.7,0.63
SMA [mm]
  rect 2x2 smd: 1(0,0) 2(4,0)
  silkscreen extent -1.3,-1.5 5.3,1.5
SOP127P1030X239-16N [mm] "SOP, 16-Leads, Body 10.5x7.6mm (max), Pitch 1.27mm, IPC Medium Density"
  oval 2.2x0.6 smd: 1(-4.575,4.445) 2(-4.575,3.175) 3(-4.575,1.905) 4(-4.575,0.635) 5(-4.575,-0.635) 6(-4.575,-1.905) 7(-4.575,-3.175) 8(-4.575,-4.445) 9(4.575,-4.445) 10(4.575,-3.175) 11(4.575,-1.905) 12(4.575,-0.635) 13(4.575,0.635) 14(4.575,1.905) 15(4.575,3.175) 16(4.575,4.445)
  silkscreen extent -4.7,-5.25 3.07,5.42, body extent -3.8,-5.25 3.8,5.25, height 2.39
SOT23-3 [mm]
  rect 1x0.6 smd: 1(0,0) 2(0,2) 3(-2.5,1)
  silkscreen extent -2.1,-0.5 -0.5,2.5
sot23-3 [mm]
  rect 1x0.6 smd: 1(0,0) 2(0,2) 3(-2.5,1)
  silkscreen extent -2.1,-0.5 -0.5,2.5
SOT563-6 [mil] "SOT563-6"
  rect 12x18 smd: 1(-19.69,-26.57) 2(0,-26.57) 3(20,-26.57) 4(20,27) 5(0,27) 6(-19.69,27)
  silkscreen extent -31,-24 32,24
TP#1 [mm]
  oval 2x1 smd far side: 1(0,0)
TP#2 [mm]
  oval 2x1 smd: 1(0,0)
TPD [mm]
  round 1 smd: 1(0,0)
TPd [mm]
  round 1 smd: 1(0,0)
TPS610997YFFR [mm]
  round 0.2 smd: A1(-0.2,0.4) A2(0.2,0.4) B1(-0.2,0) B2(0.2,0) C1(-0.2,-0.4) C2(0.2,-0.4)
  silkscreen extent -0.77,-0.63 0.46,0.63

## Part data
BATT: library part SBatery
C1 C2 C22 C23 C37: library part Cap, "Capacitor"
C3 C4 C5 C6 C7 C8 C9 C11 C12 C13 C14 C15 C16 C17 C18 C24 C25 C27 C28 C32 C33 C34 C35 C38 C40 C41 C43 C44 C46 C47 C48 C50: library part CAP, "Capacitor"
C29 C31: library part "Cap Pol3", "Polarized Capacitor (Surface Mount)"
D1: library part D
D2: library part DIODE_SCHOTTKY_0
FB2: library part INDUCTOR1
J1 J2: library part ANT
L2 L3 L4 L5 L6: library part INDUCTOR_1
P7: "Header, 5-Pin"
Q2 Q4 Q9 Q11 Q13: library part 2N1069_1
Q3 Q8 Q10 Q12: library part NCE4060K, "NMOSFET"
Q6 Q7 Q18 Q20: library part NPN
R1: library part Res3, "Resistor"
R2 R4 R5 R9 R10 R11 R12 R13 R14 R15 R16 R18 R19 R20 R21 R22 R23 R24 R25 R26 R27 R28 R29 R30 R31 R32 R33 R34 R35 R36 R37 R38 R39 R40 R42 R44 R46 R48 R49 R50 R51 R52 R65: library part RES1
R3 R6 R7: library part Res2, "Resistor"
U3: library part STM32L100R8T6, "ARM Cortex-M3 32-bit MCU, 64 KB Flash, 8 KB Internal RAM, 51 I/Os, 64-pin LQFP, -40 to 85 degC, Tray"
U5: library part SIM68MB
U8: library part SAFFB1G56KBOFA
U10: library part bq2410
U12: library part REF3012
Y1 Y2: library part XTAL, "Crystal Oscillator"

## Via types
v1: diameter 20, hole 12, Top Layer to Bottom Layer, tented both sides, 205 vias
v2: diameter 30, hole 20, Top Layer to Bottom Layer, tented both sides, 22 vias
v3: diameter 40, hole 25, Top Layer to Bottom Layer, tented both sides, 7 vias

## Nets (pads, with @x,y where several pads share a name; then routed paths per layer and width w, separated by ;. In a path a pad name is that pad's centre, name@x,y a point inside that pad or via, vN(x,y) a via of type N, cw(c..) or ccw(c..) an arc to the next point about the centre after c; other vN are vias at no path point)
2.5V: C1.1 C9.2 U3.13 U12.2 | length 590.4
  Top Layer w8: U3.13@1090.58,494.76 v1@1144.95,494.76
  Mid-Layer 2 w20: v1(1144.95,495.03) 1174.72,524.81 1174.72,686.75 v1(1153.91,707.56)
  Bottom Layer w20: C1.1@1089.72,961.28 1089.72,916.47 C9.2@1086.43,913.17 1062.85,889.6 U12.2@1062.85,857.59 1153.91,766.53 v1(1153.91,707.56)
AGND: BATT.1 C1.2 C2.1 C3.2 C4.1 C5.2 C6.1 C7.2 C8.1 C9.1 C11.1 C12.1 C13.1 C14.1 C15.1 C16.1 C17.1 C18.1 C23.1 C24.1 C25.1 C27.2 C28.2 C29.2 C31.2 C32.1 C33.1 C34.2 C35.1 C37.2 C38.1 C40.2 C41.1 C43.1 C44.2 C46.2 C47.2 C48.2 C50.1 D2.1 D3.1 D4.1 J1.2 J2.2 P7.3 Q2.2 Q3.1 Q4.2 Q9.2 Q11.2 Q13.2 R3.2 R4.2 R5.2 R9.2 R11.2 R13.2 R15.1 R20.1 R35.1 R38.1 R48.1 R52.1 T6.1 T7.1 T8.1 T13.1 T14.1 T16.1 T20.1 U1.2 U1.17 U1.18 U1.29 U1.39 U1.45 U1.46 U1.54 U1.58 U1.59 U1.61 U1.62 U1.63 U1.64 U1.65 U1.69 U1.70 U1.71 U1.72 U1.73 U1.74 U1.75 U1.76 U1.77 U1.78 U1.79 U1.80 U1.81 U1.82 U1.83 U1.84 U1.85 U1.86 U1.87 U1.88 U3.12 U3.18 U3.31 U3.47 U3.63 U5.1 U5.10 U5.12 U8.2 U8.3 U8.5 U9.1 U9.2 U10.3 U10.11 U11.1 U11.9 U12.3 U13.6 U13.8 U14.1 U14.2 U14.3 U14.6 U14.7 U15.3 U15.5 U15.8 U15.9 U16.10 U17.4 U18.A2 U18.C2 U19.4 Y2.2 Y2.4 | length 2848.1
  Top Layer w6: v1(97.76,304.69) 151.6,250.85 R38.1@151.6,229.5 ; C13.1@462.99,259.57 487.78,284.35 546.01,284.35 552.13,278.22 U3.47@598.45,278.22 ; C12.1@1265.91,171.19 1284.62,171.19 1300.2,155.61 1300.2,128.39 1309.37,119.21 1363.17,119.21 1372.18,128.22 C7.2@1372.18,148.94 ; v1(1585.63,884.05) U5.10@1638.34,884.05 ; U8.3@1612.58,805.39 U8.2@1612.58,824.09 U8.5@1635.22,824.09 v1(1653.66,824.09)
  Top Layer w10: v1(35.42,795.62) U14.2@58.37,795.62 ; v1(42.87,1115.62) 42.87,1104.61 U15.8@58.35,1089.12 U15.9@58.35,1069.43 ; U14.3@58.37,775.94 U14.1@58.37,815.31 ; U13.8@100.87,527.39 100.87,517.04 110.69,507.22 U13.6@121.05,507.22 144.72,507.22 159.52,522.02 C40.2@173.68,522.02 ; U15.3@118.39,1049.75 118.39,1035.03 v1(133.84,1019.57) ; U15.5@118.39,1089.12 124.29,1095.02 v1(124.29,1117.65) ; C41.1@122.56,661.31 122.56,661.92 83.17,701.32 83.17,721.53 103.64,742 U14.6@103.64,749.95 U14.7@123.33,749.95 ; C38.1@178.89,661.86 178.89,643.92 178.89,605.32 v1(209.5,574.71) ; v1(582.19,703.08) 612.87,703.08 701.06,703.08 716.56,687.57 U3.31@716.56,652.24 ; U3.47@598.45,278.22 674.87,278.22 v1(706.07,247.02) ; v1(918.7,245.57) 972.47,191.8 U3.63@972.47,160.11 ; U3.18@972.47,652.24 972.47,587.23 982.96,576.74 1002.22,576.74 v1(1014.55,589.07) ; v1(1041.44,469.03) 1047.49,475.07 U3.12@1090.58,475.07 ; U9.2@1463.11,793.25 U9.1@1463.11,812.93 1463.11,868.98 v1(1470.22,876.09) ; v1(1510.45,749.45) 1521.92,760.92 C25.1@1542.8,760.92
  Bottom Layer w6: v1(97.76,304.69) U18.C2@118.18,284.26
  Bottom Layer w8: U10.11@324.79,431.87 U10.3@324.79,475.18 ; v1(1176.83,1414.25) 1185.12,1422.54 C16.1@1209.23,1422.54 ; C14.1@1242.61,1271.52 1242.61,1320.79 C18.1@1244.98,1323.16 1265.3,1323.16 v1(1275.49,1312.97)
  Bottom Layer w10: v1(64.33,930) 73.31,921.02 95.31,921.02 112.98,938.69 U19.4@133.58,938.69 ; R9.2@102.36,1520.09 123.46,1498.99 v1(123.46,1489.97) ; U18.A2@149.68,284.26 209.35,343.93 C46.2@209.35,350.05 ; R20.1@268.86,941.18 268.86,996.54 C47.2@254.4,1011 v1(300.97,1011) ; Q11.2@321.11,825.07 321.11,899.23 v1(343.58,921.69) ; R35.1@659.61,557 v1(659.61,583.95) ; v1(779.48,493.97) R48.1@779.48,520.7 ; v1(886.54,359.06) 907.78,359.06 ; v1@895.13,359.06 907.78,359.06 ; v1(916.08,498.63) 916.08,532.03 935.02,550.96 940.9,550.96 ; 937.96,548.02 940.9,550.96 ; C8.1@954.15,359.06 907.78,359.06 ; R5.2@956.01,502.96 956.01,535.85 940.9,550.96 ; C3.2@956.64,550.96 940.9,550.96 ; C37.2@1102.22,726.85 1102.22,714.87 v1(1142.58,674.51) ; U12.3@1161.28,818.22 v1(1185.8,842.74)
  Bottom Layer w30: T16.1@567.9,51.33 567.9,91.91 D4.1@614.3,138.31
  other v1: 677.68,36.26 425.98,44.29 190,58 669,100 185,108 305,145 49,161 667,161 1537,166 1488,168 1609,172 1435,280 725,323 1423,348 26.54,364.8 774,385 1161,386 736,426 305.11,431.87 1159,450 210,545 1340,551 266,561 1138,571 1417,573 1606,625 1276,627 1423,633 1131,635 1061,637 473,651 90.91,693.58 380.8,702.52 586,822 437,951 1034,1083 1404.8,1094.18 1467.99,1117.12 1521.11,1122.47 1019,1136 1470.83,1214.28 483,1226 654,1231 438,1265 963,1266 880,1280 1049,1300 585,1306 1457.3,1308.26 1634,1311 1558.22,1325.55 887,1330 584,1367 1627,1387 84,1425 582,1425 35,1426 125,1439 584,1483 1592,1524 582,1530 1390,1556 1472,1562 584,1586 1340,1597 1527,1629 1382,1630 1286,1649
  other v2: 651.01,880.19 361.57,1070.8 686.31,1074.95 383.34,1222.19 541.27,1222.99 348.01,1363.52 655.82,1513.1 348.73,1518.14
  other v3: 286.76,78.81
CS: U3.50 U16.7 | length 1153
  Top Layer w6: v1(716.56,102.7) U3.50@716.56,160.11 U3.50@716.56,133.64
  Mid-Layer 1 w6: v1(716.56,102.7) 687.72,131.54 687.72,176 794.54,282.82 1256.28,282.82 1362.26,388.8 1362.26,463.18 v1(1298.67,526.77)
  Bottom Layer w6: U16.7@1241.77,526.77 v1(1298.67,526.77)
DM: T2.1 U1.28 | length 536.2
  Top Layer w8: v1(1083.22,1276.37) U1.28@1113.12,1276.37
  Mid-Layer 2 w8: v1(1083.22,1276.37) 1159.84,1199.75 1223.23,1199.75 1356.02,1332.54 1398.45,1332.54 1441.68,1375.77 1441.68,1392.75 v1@1423.14,1411.3
  other v1: 1421.25,1413.02
DP: T3.1 U1.27 | length 622.1
  Top Layer w8: v1(1061.71,1256.32) 1081.03,1237 U1.27@1113.12,1237
  Mid-Layer 2 w8: v1(1061.71,1256.32) 1141.94,1176.08 1227.19,1176.08 1365.88,1314.78 1406.13,1314.78 1458.14,1366.78 1458.14,1390.11 v1@1479.85,1411.82
  other v1: 1479.92,1413.02
DTR: Q7.3 R32.1 U1.3 | length 403.8
  Top Layer w10: U1.3@432.02,752.75 432.02,774.84 438.4,781.21 ; v1@482.41,825.23 438.4,781.21 ; v1(489.15,831.97) 438.4,781.21
  Bottom Layer w10: v1(489.15,831.97) 599.92,942.74 R32.1@599.92,970.47 600.76,971.31 Q7.3@600.76,1024.43
EN_3V8: R52.2 U3.36 U19.2 | length 718.3
  Top Layer w8: v1@460.28,533.68 v1(460.28,538.35) 503.87,494.76 U3.36@598.45,494.76
  Bottom Layer w8: U19.2@153.58,885.12 153.58,836.59 R52.2@134.76,817.77 149.37,803.15 149.37,733.17 290.24,592.31 326.91,555.64 442.99,555.64 v1(460.28,538.35)
EN_5V: R38.2 U3.45 U18.C1 | length 964.1
  Top Layer w8: v1@92,265.17 v1(88.65,268.51) 88.65,253.09 R38.2@112.23,229.5 ; U3.45@598.45,317.59 644.13,317.59 v1(683.96,357.42)
  Mid-Layer 1 w8: v1(88.65,268.51) 243.13,114.03 472.92,114.03 683.96,325.07 v1(683.96,357.42)
  Bottom Layer w8: v1(88.65,268.51) U18.C1@118.18,268.51
EN_5V1: R37.2 U3.35 | length 513.4
  Top Layer w8: v1(467.46,568.03) 521.05,514.44 U3.35@598.45,514.44
  Mid-Layer 1 w8: v1(257.06,663.74) 371.75,663.74 v1(467.46,568.03)
  Bottom Layer w8: R37.2@182.56,743.01 182.56,738.24 v1(257.06,663.74)
EN_5V2: R51.2 U3.37 | length 640.3
  Top Layer w8: v1(437.65,523.4) 485.98,475.07 U3.37@598.45,475.07
  Bottom Layer w8: R51.2@51.85,639.71 76.08,615.49 139.66,615.49 170.42,646.25 216.74,646.25 254.35,608.64 323.83,539.16 421.89,539.16 v1(437.65,523.4)
LNA_EN: U5.13 U9.5 | length 369.1
  Top Layer w8: U9.5@1482.79,793.25 1495.61,793.25 v1(1510.17,778.69) ; v1(1584.39,1009.02) 1587.09,1011.72 U5.13@1638.34,1011.72
  Mid-Layer 2 w8: v1(1510.17,778.69) 1510.17,968.1 1551.09,1009.02 v1(1584.39,1009.02)
MDTR: Q7.2 U3.21 | length 1119.1
  Top Layer w10: v1(871.57,552.27) 899.52,552.27 913.41,566.16 U3.21@913.41,652.24
  Mid-Layer 2 w10: v1(669.63,1122.86) 810.33,1122.86 849.75,1083.44 849.75,817.44 ; 849.75,598.15 849.75,817.44 ; v1(871.57,552.27) 849.75,574.09 849.75,817.44
  Bottom Layer w10: Q7.2@640.13,1122.86 v1(669.63,1122.86)
MISO: U3.44 U16.8 | length 1128.6
  Top Layer w6: U3.44@598.45,337.28 630.71,337.28 689.86,396.43 v1@728.54,396.43
  Mid-Layer 1 w6: v1(729.12,395.85) 818.48,306.48 1072.82,306.48 1258.34,306.48 1347.64,395.78 1347.64,450.52 1270.52,527.63 1270.52,548.63 v1(1298.67,576.77)
  Bottom Layer w6: U16.8@1241.77,576.77 v1(1298.67,576.77)
MOSI: U3.57 U16.15 | length 902.9
  Top Layer w6: U3.57@854.36,160.11 854.36,91.49 v1(866.33,79.51)
  Mid-Layer 1 w6: v1(866.33,79.51) 960.74,173.91 1305.66,173.91 1382.49,250.74 1501.76,250.74 v1(1527.79,276.77)
  Bottom Layer w6: v1(1527.79,276.77) U16.15@1602,276.77
MRI: Q6.3 R30.1 U3.22 | length 548.1
  Top Layer w10: v1(893.2,576.51) 893.73,577.04 U3.22@893.73,652.24
  Mid-Layer 2 w10: v1(893.2,576.51) 879.06,590.65 879.06,902.4 v1(898.1,921.44)
  Bottom Layer w10: v1(898.1,921.44) 923.08,946.41 R30.1@923.08,973.7 924.16,974.79 Q6.3@924.16,1024.18
NBIOT_GRXD: U3.17 U5.2 | length 873.1
  Top Layer w10: U3.17@992.15,652.24 1039.86,652.24 v1(1062.15,674.54) ; U5.2@1256.45,1187.2 1351.64,1187.2 v1(1372.84,1166.01)
  Mid-Layer 2 w10: v1(1062.15,674.54) 1077.64,690.02 1077.64,864.01 1264.85,1051.23 1264.85,1127.56 1312.65,1175.36 1363.49,1175.36 v1(1372.84,1166.01)
NBIOT_GTXD: U3.16 U5.3 | length 768.8
  Top Layer w10: U3.16@1090.58,553.81 1090.58,648.67 v1@1111.13,669.22 ; U5.3@1256.45,1143.9 v1(1334.91,1143.9)
  Mid-Layer 2 w10: v1(1110.9,670.28) 1110.9,797.39 1334.91,1021.4 v1(1334.91,1143.9)
NBIOT_NRXD: Q18.3 R42.1 U3.59 | length 1370
  Top Layer w10: U3.59@893.73,160.11 893.73,222.45 v1(893.79,222.52)
  Mid-Layer 1 w10: v1@893.73,223.44 1330.13,223.44 v1(1375.15,268.45)
  Mid-Layer 2 w10: v1(1355.61,937.36) 1333.05,914.81 1333.05,810.98 1375.15,768.88 v1(1375.15,268.45)
  Bottom Layer w10: v1@1356.96,936.63 Q18.3@1400.37,936.63 1400.37,970.85 1411.45,981.94 R42.1@1411.45,1000.45
NBIOT_NTXD: Q20.2 U3.58 | length 1163.3
  Top Layer w10: U3.58@873.43,158.11 v1(873.43,239.39)
  Mid-Layer 2 w10: v1(794.35,1064.56) 810.17,1048.74 810.17,802.83 625.09,617.75 625.09,464.94 776.81,313.22 799.6,313.22 v1(873.43,239.39)
  Bottom Layer w10: v1(794.35,1064.56) 810.17,1080.39 Q20.2@810.17,1115.4
NET: J1.1 U1.60 | length 131.1
  Top Layer w20: J1.1@119.27,1270.68 158.47,1231.47 ccw(c159.2,1232.2) 159.2,1231.17 171.09,1219.28 ccw(c223.36,1271.54) U1.60@223.36,1197.63
NET_LIGHT: LED1.1 U1.52 | length 190.9
  Top Layer w8: LED1.1@116.28,1534.01 167.53,1585.26 206.22,1585.26 223.36,1568.13 U1.52@223.36,1512.59
NetBATT_2: BATT.2 R7.2 U3.1 | length 404.6
  Top Layer w10: v1(1019.28,198.27) 1019.28,230.17 1047.65,258.54 U3.1@1090.58,258.54
  Bottom Layer w20: 744.56,189.2 758.05,175.71 BATT.2@872.01,175.71 996.72,175.71 v1(1019.28,198.27)
NetC2_2: C2.2 R18.2 | length 44.3
  Bottom Layer w8: R18.2@1256.45,1063.14 1257.16,1062.43 C2.2@1300.49,1062.43
NetC3_1: C3.1 R2.2 R5.1 U3.8 | length 234.5
  Top Layer w10: v1@994.73,470.98 994.73,425.73 1024.12,396.33 U3.8@1090.58,396.33
  Bottom Layer w10: v1(993.72,470.71) 993.72,501.31 R5.1@995.38,502.96 995.38,550.33 C3.1@996.01,550.96
NetC4_2: C4.2 R1.1 U3.5 Y2.1 | length 608.1
  Top Layer w6: U3.5@1090.58,337.28 1174.38,337.28 1293.35,456.25 1387.04,456.25 R1.1@1400.98,442.31 1491.97,442.31 Y2.1@1535.12,399.16 1596.93,399.16 C4.2@1617.28,419.52
NetC5_1: C5.1 U3.4 Y1.2 | length 319.1
  Top Layer w6: U3.4@1090.58,317.59 1196.55,317.59 1241.3,272.85 1265.01,272.85 1290.28,298.11 Y1.2@1313.4,298.11 1313.4,335.66 C5.1@1334.39,356.65
NetC6_2: C6.2 R1.2 U3.6 Y2.3 | length 521.4
  Top Layer w6: U3.6@1090.58,356.96 U3.6@1093.9,356.96 ; U3.6@1091.51,354.58 U3.6@1093.9,356.96 ; C6.2@1468.29,573.47 1468.29,487.1 Y2.3@1467.66,486.47 1405.77,486.47 R1.2@1400.98,481.68 1395.57,481.68 1383.52,469.64 1288.76,469.64 1176.08,356.96 U3.6@1093.9,356.96
NetC7_1: C7.1 U3.3 Y1.1 | length 332
  Top Layer w6: U3.3@1090.58,297.91 1185.78,297.91 1227.15,256.53 1273.09,256.53 1313.4,216.22 Y1.1@1313.4,213.11 1313.4,168.35 C7.1@1332.81,148.94
NetC8_2: C8.2 R6.2 U3.7 | length 155
  Top Layer w6: v1(1026.77,374.26) 1029.16,376.65 U3.7@1090.58,376.65
  Bottom Layer w6: R6.2@993.52,409.67 C8.2@993.52,359.06 1011.58,359.06 v1(1026.77,374.26)
NetC22_1: C22.1 U8.4 | length 87.9
  Top Layer w10: C22.1@1568.88,809.95 1590.17,788.66 1628.46,788.66 1635.22,795.41 U8.4@1635.22,805.39
NetC22_2: C22.2 U9.6 | length 48
  Top Layer w10: U9.6@1482.79,812.93 1526.53,812.93 C22.2@1529.51,809.95